# Altium PCB main.PcbDoc (part 2 of 2)
Units mm, origin at the board's own origin, x right, y up, seen from the top; angles counter-clockwise.
Board outline 137 x 49 mm, 4 copper layers (Top Layer, Layer 1, Layer 2, Bottom Layer), stack 0.569 mm thick; 63 components, 65 nets, 373 pads, 299 vias.
Unrouted connection lines stored in the file: 6.
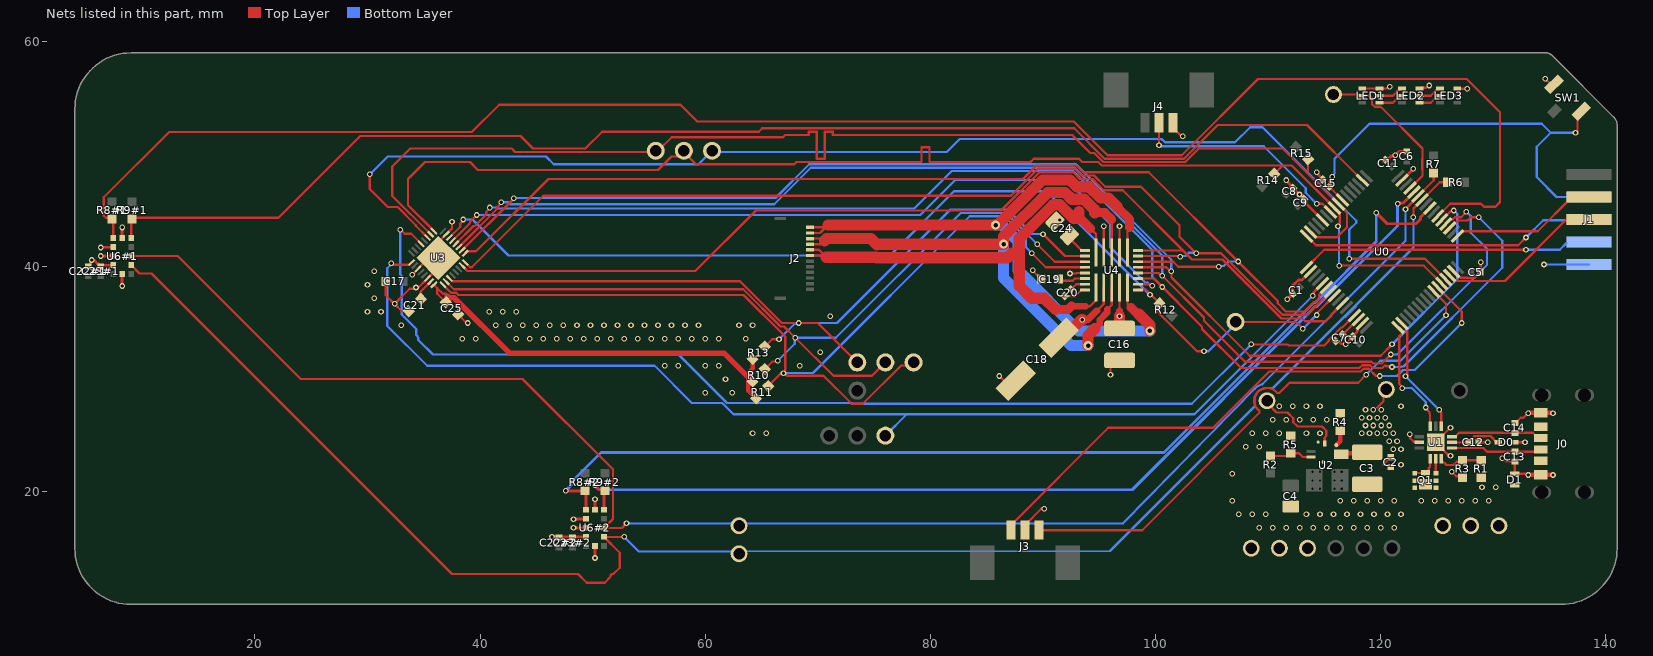
[diagram p4: the nets of this part, all layers, seen from the top]

## Via types
v1: diameter 0.5, hole 0.3, Top Layer to Bottom Layer, tented both sides, 295 vias
v2: diameter 0.8, hole 0.4, Top Layer to Bottom Layer, tented both sides, 4 vias

## Nets (pads, with @x,y where several pads share a name; then routed paths per layer and width w, separated by ;. In a path a pad name is that pad's centre, name@x,y a point inside that pad or via, vN(x,y) a via of type N, cw(c..) or ccw(c..) an arc to the next point about the centre after c; other vN are vias at no path point) (continued)
GND: C1.1 C2.1 C3.1 C4.1 C5.1 C6.1 C7.1 C8.1 C9.1 C10.1 C11.1 C12.1 C13.1 C14.1 C15.1 C16.2 C17.1 C18.1 C21.1 C22#1.1 C22#2.1 C23#1.1 C23#2.1 C24.2 C25.1 D1.2 J0.A12 J0.B12 J1.6 J3.2 J4.1 LED1.1 LED1.6 LED2.6 LED3.6 pad.TP10 pad.TP11 pad.TP12 R3.2 R4.2 R5.2 SW1.2 U0.12 U0.18 U0.31 U0.47 U0.63 U1.2 U1.13 U2.3 U2.9 U3.11 U3.14 U3.31 U3.33 U4.10 U4.12 U4.18 U6#1.2 U6#1.3 U6#1.4 U6#1.6 U6#1.12 U6#2.2 U6#2.3 U6#2.4 U6#2.6 U6#2.12 | length 92.3
  Top Layer w0.2: C17.1@31.625,38.7 31.625,37.475 v1(32.4,36.7) ; C21.1@33.152,36.052 33.048,36.052 v1(32.4,36.7) ; v1(33.962,39.299) 33.964,39.299 34.479,39.814 U3.11@34.48,39.814 35.449,40.783 U3.33@36.297,40.783 ; v1(34.305,38.155) v1@34.411,38.049 ; v1(37.5,44) 37.5,43.403 36.983,42.885 U3.31@36.983,42.883 36.297,42.197 U3.33@36.297,40.783 ; C25.1@38.048,35.752 38.775,35.025 38.875,35.025 v1(38.9,35) ; v1(86.1,30.3) 86.555,29.845 87.545,29.845 C18.1@87.582,29.882 ; J3.2@88.4,16.605 88.4,17.049 89.851,18.5 v1(90.1,18.5) ; C24.2@91.053,44.047 91.397,44.047 v1(91.501,44.151) ; v1(92.4,39.4) 92.95,39.4 92.995,39.445 93.745,39.445 U4.18@93.75,39.45 ; U4.12@95.4,41.25 v1(95.4,43.6) ; v1(96,30.4) 96,31.1 96.58,31.68 C16.2@96.8,31.68 ; U4.10@96.8,41.25 v1(96.8,43.6) ; J4.1@101.55,52.796 101.55,52.351 102.244,51.657 102.343,51.657 v1(102.4,51.6) ; v1(114.3,48.4) 114.3,48.332 114.828,47.804 C15.1@114.828,47.736 ; C7.1@115.995,33.389 116.236,33.389 116.467,33.157 116.843,33.157 v1(116.9,33.1) 116.9,33.154 117.496,33.75 C10.1@117.496,33.804 117.891,34.199 117.891,34.287 117.949,34.346 117.949,34.558 U0.31@118.365,34.973 ; LED1.1@118.36,55.83 LED1.6@119.9,55.83 119.901,55.831 120.55,55.831 120.719,56 v1(120.8,56) ; v1(122.561,25.105) 122.618,25.047 122.618,24.755 122.925,24.449 123.382,24.449 U1.2@123.432,24.399 ; LED2.6@123.44,55.83 123.5,55.89 124.009,55.89 124.219,56.1 v1(124.3,56.1) ; v1(126.2,23.2) 126.143,23.257 126.024,23.257 U1.13@124.882,24.399 126.183,25.7 v1(126.2,25.7) ; v1(126.3,21.8) 126.707,21.393 127.146,21.393 R3.2@127.277,21.261 ; U0.47@126.48,39.569 126.55,39.569 127.09,39.03 128.383,39.03 128.876,39.523 128.876,40.376 v1(128.9,40.4) ; LED3.6@126.8,55.83 126.815,55.815 127.685,55.815 v1(127.7,55.8) ; v1(130.8,23) 130.881,23 131.174,22.707 C13.1@131.92,22.707 131.9,22.687 D1.2@131.9,21.621 132.898,21.621 133.019,21.5 v1(133.1,21.5) ; C14.1@131.92,26.107 131.95,26.107 132.433,26.59 132.69,26.59 v1(133.1,27) ; v1(134.6,56.7) 135.096,56.204 SW1.2@135.396,56.204 ; v1(32.4,36.7) 33.749,38.049 34.038,38.049 34.087,38.097 34.208,38.097 34.256,38.049 v1@34.411,38.049 ; v1@34.411,38.049 U3.14@35.329,38.966 36.297,39.934 U3.33@36.297,40.783
  Top Layer w0.254: C22#1.1@5.2,40.03 5.23,40.03 5.373,40.173 5.373,40.406 5.5,40.533 v1(5.5,40.6) 5.547,40.553 5.747,40.553 6.17,40.13 7.378,40.13 U6#1.2@7.4,40.152 ; v1(6.295,40.952) U6#1.3@7.4,40.952 ; v1@6.314,41.733 7.381,41.733 U6#1.4@7.4,41.752 ; v1(8.2,38.285) U6#1.12@8.2,39.352 ; U6#1.6@8.2,42.552 v1(8.2,43.492) ; v1(46.385,16.025) 46.432,15.978 46.978,15.978 47,16 U6#2.2@49.4,16 ; v1(48.295,16.8) U6#2.3@49.4,16.8 ; v1@48.314,17.581 49.381,17.581 U6#2.4@49.4,17.6 ; v1(50.2,14.133) U6#2.12@50.2,15.2 ; U6#2.6@50.2,18.4 v1(50.2,19.34) ; v1(111.6,47.7) 111.6,47.654 112.204,47.05 C8.1@112.204,47.004 113.37,45.838 113.37,45.608 U0.12@114.829,44.149 ; v1(111.7,37.1) C1.1@112.196,37.596 112.175,37.617 112.175,38.131 ; 112.174,38.131 112.174,38.319 112.689,38.834 113.001,38.834 113.736,39.569 U0.18@113.769,39.569 ; C11.1@120.4,49.5 120.602,49.5 120.955,49.853 121.253,49.853 v1(121.3,49.9) 121.63,50.23 C6.1@122.3,50.23 ; U0.63@121.883,47.684 v1(122.9,48.7) ; C12.1@128.667,24.407 v1(129.507,24.407)
  Top Layer w0.4: v1(133.1,21.5) 133.115,21.515 134.205,21.515 J0.B12@134.22,21.53 134.235,21.515 135.285,21.515 v1(135.3,21.5) ; v1(133.1,27) 133.115,27.015 134.205,27.015 J0.A12@134.22,27.03 134.235,27.015 135.285,27.015 v1(135.3,27)
  Bottom Layer w0.2: v1(134.5,40.2) J1.6@138.5,40.2
  other v1: 109.2,16.8 110.4,16.8 111.6,16.8 112.8,16.8 114,16.8 115.2,16.8 116.4,16.8 117.6,16.8 118.8,16.8 120,16.8 121.2,16.8 48.295,17.562 107.4,18 108.6,18 109.8,18 113.4,18 114.6,18 115.8,18 117,18 118.2,18 119.4,18 120.6,18 121.8,18 106.8,19.2 116.4,19.2 117.6,19.2 118.8,19.2 120,19.2 121.2,19.2 106.8,21.6 108,24 109.2,24 64.2,25.2 65.4,25.2 108.6,25.2 109.8,25.2 111,25.2 113.4,25.2 114.6,25.2 110.4,26.4 111.6,26.4 112.8,26.4 114,26.4 115.2,26.4 111,27.6 112.2,27.6 113.4,27.6 114.6,27.6 121.8,27.6 60,28.8 62.4,28.8 61.8,30 56.4,31.2 57.6,31.2 60,31.2 61.2,31.2 68.4,31.2 70.2,32.4 38.4,33.6 39.6,33.6 43.2,33.6 44.4,33.6 45.6,33.6 46.8,33.6 48,33.6 49.2,33.6 50.4,33.6 51.6,33.6 52.8,33.6 54,33.6 55.2,33.6 56.4,33.6 57.6,33.6 58.8,33.6 60,33.6 61.2,33.6 63.6,33.6 33,34.8 41.4,34.8 42.6,34.8 43.8,34.8 45,34.8 46.2,34.8 47.4,34.8 48.6,34.8 49.8,34.8 51,34.8 52.2,34.8 53.4,34.8 54.6,34.8 55.8,34.8 57,34.8 58.2,34.8 59.4,34.8 63,34.8 64.2,34.8 71.1,35.6 30,36 31.2,36 40.8,36 42,36 43.2,36 30.6,37.2 30,38.4 30.6,39.6 6.295,41.714 112.787,46.421
MOSI: pad.TP35 U0.45 U3.3 | length 115
  Top Layer w0.2: v1(30.2,48.2) 30.2,46.9 31.8,45.3 32.678,45.3 34.281,43.697 34.281,43.647 U3.3@35.329,42.6 ; v1(117.2,40.7) 123.935,40.7 U0.45@125.772,38.862
  Bottom Layer w0.2: v1(30.2,48.2) 31.8,49.8 45.85,49.8 46.55,49.1 59.4,49.1 pad.TP35@60.6,50.3 ; pad.TP35@60.669,49.9 61,49.9 61,49.953 61.247,50.2 81.461,50.2 82.611,51.35 100.528,51.35 100.828,51.05 107.05,51.05 108.4,52.4 109.5,52.4 117.817,44.083 117.817,43.917 117.2,43.3 v1(117.2,40.7)
NetC7_2: C7.2 U0.30 | length 2
  Top Layer w0.2: C7.2@116.603,33.997 116.642,33.997 117.972,35.327 U0.30@118.011,35.327
NetC12_2: C12.2 D0.1 U1.8 | length 4.6
  Top Layer w0.2: U1.8@126.332,24.399 127.799,24.399 C12.2@127.807,24.407 127.807,24.437 128.317,24.947 129.27,24.947 129.28,24.957 129.743,24.957 130.293,24.407 D0.1@130.433,24.407
NetC13_2: C13.2 J0.A5 U1.7 | length 8.1
  Top Layer w0.2: U1.7@126.332,23.899 129.108,23.899 129.44,23.567 C13.2@131.92,23.567 134.007,23.567 J0.A5@134.22,23.78
NetC14_2: C14.2 J0.B5 U1.9 | length 8.2
  Top Layer w0.2: U1.9@126.332,24.899 126.607,24.899 126.955,25.247 129.145,25.247 129.155,25.257 129.859,25.257 129.869,25.247 C14.2@131.92,25.247 133.512,25.247 133.979,24.78 J0.B5@134.22,24.78
NetC15_2: C15.2 J1.9 SW1.1 U0.7 | length 39.3
  Top Layer w0.2: v1(115.7,48) 115.7,47.919 115.457,47.676 115.457,47.15 C15.2@115.436,47.128 115.436,47.103 116.597,45.942 U0.7@116.597,45.916 ; v1(137.3,51.9) 137.482,52.082 137.482,53.482 SW1.1@137.8,53.8
  Bottom Layer w0.2: v1(115.7,48) 115.7,48.067 115.9,48.267 115.9,49.6 119,52.7 134.3,52.7 135.1,51.9 ; v1(137.3,51.9) 135.1,51.9 ; J1.9@138.5,46.2 135.622,46.2 133.85,47.972 133.85,50.65 135.1,51.9
NetC19_1: C19.1 U4.19 | length 2.5
  Top Layer w0.2: C19.1@91.375,38.9 91.525,38.75 92.652,38.75 92.852,38.95 U4.19@93.75,38.95
NetC20_1: C20.1 U4.21 | length 2.1
  Top Layer w0.2: C20.1@91.896,37.396 91.917,37.375 92.858,37.375 93.433,37.95 U4.21@93.75,37.95
NetC20_2: C20.2 U4.20 | length 1.4
  Top Layer w0.2: C20.2@92.504,38.004 92.95,38.45 U4.20@93.75,38.45
NetC21_2: C21.2 U3.15 | length 1.9
  Top Layer w0.2: C21.2@34.7,37.181 34.7,37.533 34.73,37.563 34.7,37.593 34.7,37.771 U3.15@35.611,38.683
NetC24_1: C24.1 U4.14 | length 2.1
  Top Layer w0.2: C24.1@92.347,42.753 92.347,42.536 93.433,41.45 U4.14@93.75,41.45
NetC25_2: C25.2 R10.2 R11.2 R13.2 U3.16 | length 37.1
  Top Layer w0.2: U3.16@35.894,38.4 36.2,38.094 ; C25.2@36.952,36.848 36.2,37.6 36.2,38.094 ; 37.083,37.383 37.083,37.483 36.966,37.6 36.694,37.6 36.2,38.094
  Top Layer w0.4: R10.2@63.838,29.822 63.838,28.967 R11.2@64.501,28.304 ; R10.2@64.201,29.804 64.201,29.849 63.863,30.187 63.855,30.195 63.855,30.595 64.219,30.959 64.219,31.786 R13.2@64.201,31.804
  Top Layer w0.5: 37.083,37.383 37.223,37.244 37.695,37.244 42.639,32.3 61.7,32.3 63.838,30.162
NetJ1_3: J1.3 U0.46 | length 13.3
  Top Layer w0.2: U0.46@126.126,39.216 126.541,38.8 126.754,38.8 126.824,38.73 131.03,38.73 J1.3@136.8,44.5
NetJ1_4: J1.4 U0.49 | length 13.1
  Top Layer w0.2: U0.49@126.833,42.734 127.249,43.15 133.95,43.15 137,46.2 J1.4@138.5,46.2
NetJ1_7: J1.7 U0.17 | length 24
  Top Layer w0.2: U0.17@113.415,39.923 114.992,41.5 v1(132.9,41.5)
  Bottom Layer w0.2: v1(132.9,41.5) 135.9,41.5 136.5,42.1
NetJ1_8: J1.8 U0.16 | length 25.1
  Top Layer w0.2: U0.16@113.344,42.734 U0.16@113.415,42.734 114.243,41.907 132.207,41.907 v1(132.9,42.6)
  Bottom Layer w0.2: v1(132.9,42.6) 134.44,44.14 J1.8@137.16,44.14
NetJ4_2: J4.2 U0.10 | length 19.9
  Top Layer w0.2: v1(100.3,50.8) J4.2@100.3,52.796 ; v1(114.3,45.6) 114.311,45.589 114.803,45.589 U0.10@115.536,44.856
  Bottom Layer w0.2: v1@100.3,50.7 109.6,50.7 113.337,46.963 113.337,46.563 v1(114.3,45.6)
NetLED1_2: LED1.2 pad.TP1 U0.61 | length 14.2
  Top Layer w0.2: pad.TP1@115.8,55.3 118.07,55.3 118.17,55.2 LED1.2@118.36,55.2 119,55.2 119.234,54.966 119.234,54.444 119.467,54.21 119.99,54.21 123.7,50.5 123.7,49.574 123.694,49.567 123.694,48.633 123.7,48.626 123.7,48.087 U0.61@122.59,46.977
NetLED1_4: LED1.4 LED2.2 | length 2.3
  Top Layer w0.2: LED1.4@119.9,54.57 121.08,54.57 121.71,55.2 LED2.2@121.9,55.2
NetLED1_5: LED1.5 LED2.1 | length 2.3
  Top Layer w0.2: LED1.5@119.9,55.2 121.08,55.2 121.71,55.83 LED2.1@121.9,55.83
NetLED2_4: LED2.4 LED3.2 | length 2.1
  Top Layer w0.2: LED2.4@123.44,54.57 124.44,54.57 125.07,55.2 LED3.2@125.26,55.2
NetLED2_5: LED2.5 LED3.1 | length 2.1
  Top Layer w0.2: LED2.5@123.44,55.2 124.44,55.2 125.07,55.83 LED3.1@125.26,55.83
NetQ1_G: Q1.G U1.5 | length 1.3
  Top Layer w0.2: U1.5@124.882,22.949 124.891,22.94 124.891,21.659 Q1.G@124.9,21.65
NetR1_2: R1.2 R3.1 U1.6 | length 4
  Top Layer w0.2: U1.6@125.382,22.949 125.382,22.861 125.843,22.4 126.468,22.4 126.747,22.679 127.146,22.679 R3.1@127.277,22.811 R1.2@128.928,22.811
NetR2_2: R2.2 R5.1 U2.2 | length 3.8
  Top Layer w0.2: R2.2@110.221,23.192 111.766,23.192 R5.1@112,23.425 112.749,23.425 113.078,23.096 U2.2@113.795,23.096
NetR4_1: R4.1 U2.7 | length 1.4
  Top Layer w0.4: U2.7@116.058,24.158 116.4,24.501 R4.1@116.4,25.425
NetR8#1_2: R8#1.2 U0.54 U6#1.5 | length 151.8
  Top Layer w0.2: U6#1.5@7.4,42.552 7.4,44.152 R8#1.2@7.311,44.241 7.206,44.346 6.769,44.346 6.578,44.538 6.578,46.166 12.374,51.962 39.262,51.962 41.7,54.4 57.793,54.4 59.293,52.9 92.723,52.9 95.723,49.9 102.316,49.9 109.093,56.677 127.639,56.677 130.596,53.72 130.596,45.742 130.185,45.33 129.17,45.33 128.9,45.6 126.163,45.6 U0.54@125.065,44.502
NetR8#2_2: R8#2.2 U0.56 U6#2.5 | length 93.2
  Top Layer w0.254: v1(47.6,20.1) 47.611,20.089 R8#2.2@49.311,20.089 49.4,20 U6#2.5@49.4,18.4 ; v1(119.6,44.8) 120.577,43.823 123.139,43.823 123.541,44.225 123.541,44.392 U0.56@124.358,45.209
  Bottom Layer w0.254: v1(47.6,20.1) 48.208,20.708 48.208,20.973 50.735,23.5 70.369,23.5 70.376,23.493 71.624,23.493 71.631,23.5 100.734,23.5 114.073,36.839 114.204,36.839 119.6,42.234 v1(119.6,44.8)
NetR9#1_2: R9#1.2 U0.2 U6#1.7 | length 119.7
  Top Layer w0.2: U6#1.7@9,42.552 9,44.152 R9#1.2@9.089,44.241 9.194,44.346 22.098,44.346 29.36,51.608 43.592,51.608 44.7,50.5 49.34,50.5 50.84,52 64.759,52 65.059,52.3 92.767,52.3 95.467,49.6 102.517,49.6 105.517,52.6 113.449,52.6 U0.2@118.365,47.684
NetR9#2_2: R9#2.2 U0.60 U6#2.7 | length 87.9
  Top Layer w0.254: v1(50.2,20.6) 50.2,20.541 50.547,20.194 50.984,20.194 R9#2.2@51.089,20.089 51,20 U6#2.7@51,18.4 ; v1(121.5,45.6) 121.547,45.647 121.968,45.647 U0.60@122.944,46.623
  Bottom Layer w0.254: v1(50.2,20.6) 50.2,20.541 50.547,20.194 97.929,20.194 114.22,36.485 114.351,36.485 121.5,43.634 v1(121.5,45.6)
NetR10_1: pad.TP29 R10.1 U3.18 U4.16 | length 79.3
  Top Layer w0.2: U3.18@36.983,38.683 36.986,38.683 37.669,38 63.376,38 66.676,34.7 67,34.7 v1(68,33.7) 71.38,30.32 74.82,30.32 pad.TP29@76,31.5 ; R10.1@65.296,30.899 65.991,31.594 66.391,31.594 v1(66.449,31.651) ; v1(89.5,42) 91.05,40.45 U4.16@93.75,40.45
  Bottom Layer w0.2: v1(66.449,31.651) 67.947,33.15 67.947,33.647 v1(68,33.7) 71.6,33.7 82.684,44.784 86.716,44.784 v1(89.5,42)
NetR11_1: pad.TP30 R11.1 U3.17 U4.17 | length 86.6
  Top Layer w0.2: U3.17@36.7,38.4 36.703,38.4 37.409,37.694 37.882,37.694 38.076,37.5 63.4,37.5 67.099,33.801 67.099,30.783 66.949,30.633 v1(66.949,30.551) ; R11.1@65.596,29.399 66.691,30.494 66.891,30.494 v1(66.949,30.551) ; pad.TP30@78.5,31.5 78.232,31.232 77.401,31.232 73.989,27.82 73.011,27.82 70.511,30.32 67.261,30.32 67.03,30.551 v1(66.949,30.551) ; v1(89,41.2) 90.25,39.95 U4.17@93.75,39.95
  Bottom Layer w0.2: v1(66.949,30.551) 69.568,30.551 83.5,44.484 86.562,44.484 88.5,42.546 88.5,41.7 v1(89,41.2)
NetR12_2: pad.TP27 R12.2 U0.24 U3.30 U4.1 | length 93.8
  Top Layer w0.2: U3.30@37.266,42.6 38.223,43.557 38.223,43.842 38.5,44.119 v1(38.5,44.2) ; U4.1@98.45,37.95 99.15,37.95 R12.2@100.352,36.748 100.352,36.561 100.106,36.315 100.106,36.067 103.673,32.5 v1(104.3,32.5) ; pad.TP27@107.1,35.1 112.489,35.1 v1(113.089,34.5) ; v1(114.3,35.711) 114.357,35.768 114.357,35.916 U0.24@115.89,37.448
  Bottom Layer w0.2: v1(38.5,44.2) 39.322,44.2 42.522,41 76.4,41 82.1,46.7 90.3,46.7 v1(99.5,37.5) ; v1(104.3,32.5) 104.7,32.5 107.1,34.9 pad.TP27@107.1,35.1 ; v1(113.089,34.5) v1(114.3,35.711)
NetR13_1: pad.TP28 R13.1 U3.19 U4.15 | length 74.5
  Top Layer w0.2: U3.19@37.266,38.966 37.269,38.966 37.523,38.711 63.089,38.711 66.8,35 v1(68.3,35) 70,35 pad.TP28@73.5,31.5 ; R13.1@65.296,32.899 65.949,33.551 v1(66.549,33.551) ; v1(90,42.9) 91.95,40.95 U4.15@93.75,40.95
  Bottom Layer w0.2: v1(66.549,33.551) 67.94,34.943 v1@68.243,34.943 ; v1(68.3,35) 71.7,35 81.784,45.084 86.841,45.084 89.024,42.9 v1(90,42.9)
NetU0_22: U0.22 U3.25 U4.6 | length 95.5
  Top Layer w0.2: U3.25@38.68,41.186 38.873,41.379 39.643,41.379 46.065,47.8 88.23,47.8 89.432,49.002 92.943,49.002 93.545,48.4 99.4,48.4 v1(107.331,40.469) 110.85,36.95 110.85,36.748 111.567,36.031 113.208,36.031 114.044,36.866 114.193,36.866 114.515,37.188 114.515,37.488 U0.22@115.183,38.155 ; U4.6@98.45,40.45 101.572,40.45 102.022,40 v1(105.6,40)
  Bottom Layer w0.2: v1(105.6,40) 105.657,40.057 106.057,40.057 106.469,40.469 v1(107.331,40.469)
NetU0_23: U0.23 U3.24 U4.7 | length 92.8
  Top Layer w0.2: U3.24@38.68,40.38 39.097,39.963 39.263,39.963 45.6,46.3 87.154,46.3 89.556,48.702 92.818,48.702 93.421,48.1 94.525,48.1 95.525,47.1 98.7,47.1 102.125,43.675 102.125,42.675 v1(103.6,41.2) 105.814,41.2 111.283,35.731 113.465,35.731 114.301,36.566 114.318,36.566 114.815,37.064 114.815,37.081 U0.23@115.536,37.802 ; U4.7@98.45,40.95 102.148,40.95 v1(102.199,40.899)
  Bottom Layer w0.2: v1(102.199,40.899) 102.257,40.957 102.657,40.957 102.95,41.25 103.55,41.25 v1(103.6,41.2)
NetU0_26: U0.26 U3.23 U4.8 | length 92.2
  Top Layer w0.2: U3.23@38.397,40.097 38.874,39.62 59.12,39.62 64.5,45 86.278,45 89.681,48.402 92.694,48.402 93.296,47.8 94.401,47.8 95.001,47.2 95.401,46.8 97.076,46.8 102.426,41.45 ; U4.8@98.45,41.45 102.426,41.45 ; U0.26@116.597,36.741 115.631,35.775 115.631,35.676 115.117,35.161 113.272,35.161 113.034,35.4 111.189,35.4 105.953,40.636 103.24,40.636 102.426,41.45
NetU0_29: U0.29 U3.5 | length 101.7
  Top Layer w0.2: v1(32.9,43.3) 32.919,43.3 33.299,42.921 33.876,42.921 U3.5@34.763,42.034 ; v1(108.5,33.1) 111.729,33.1 111.829,33 114.977,33 115.392,33.415 115.392,33.493 116.499,34.6 116.577,34.6 U0.29@117.658,35.68
  Bottom Layer w0.2: v1(32.9,43.3) 32.9,39.323 33.043,39.18 33.043,35.757 34.325,34.475 34.325,33.958 34.431,33.852 ccw(c35.459,34.245) 34.442,33.824 34.494,33.699 34.494,33.513 34.552,33.454 35.807,32.2 57.624,32.2 61.924,27.9 73.073,27.9 ccw(c73.5,29) 73.503,27.82 103.22,27.82 v1(108.5,33.1)
NetU0_33: U0.33 U1.12 | length 10.7
  Top Layer w0.2: U0.33@121.53,34.62 121.945,34.204 121.945,34.134 121.65,33.838 121.65,29.576 121.945,29.281 v1@121.945,29.245 ; v1(124,27.5) 124,27.419 124.34,27.079 124.34,26.948 124.382,26.906 U1.12@124.382,25.849
  Bottom Layer w0.2: v1(121.923,29.223) 122.755,29.223 124,27.978 v1(124,27.5)
NetU0_34: U0.34 U1.10 | length 10.7
  Top Layer w0.2: U0.34@121.883,34.973 122.299,34.558 122.299,34.346 122.357,34.287 122.357,30.439 v1(122.2,30.281) ; v1(125.191,27.3) 125.191,27.219 125.382,27.027 U1.10@125.382,25.849
  Bottom Layer w0.2: v1(122.2,30.281) 125.181,27.3 v1@125.2,27.3
NetU0_51: U0.51 U3.28 U4.3 | length 119.4
  Top Layer w0.2: U3.28@37.831,42.034 39.418,43.621 39.521,43.621 40.54,44.64 40.54,44.874 40.843,45.176 v1(40.843,45.257) ; U4.3@98.45,38.95 99.85,38.95 104.129,34.671 104.129,34.471 107.6,31 118.098,31 118.348,31.25 119.052,31.25 119.302,31 120.124,31 120.324,31.2 120.49,31.2 120.533,31.157 120.943,31.157 v1(121,31.1) ; U0.51@126.126,43.442 126.197,43.442 126.855,44.1 127.7,44.1 128,44.4 v1(128.7,44.4)
  Bottom Layer w0.2: v1(40.843,45.257) 41.472,45.257 41.556,45.173 78.573,45.173 81.9,48.5 92.678,48.5 99.7,41.478 99.7,39.1 v1(100.6,38.2) ; v1(121,31.1) 121.817,31.1 121.848,31.131 122.031,31.131 130.8,39.9 130.8,42.3 v1(128.7,44.4)
NetU0_52: U0.52 U3.27 U4.4 | length 116.7
  Top Layer w0.2: U3.27@38.114,41.751 38.117,41.751 41.523,45.157 41.523,45.299 41.877,45.652 v1(41.877,45.723) ; U4.4@98.45,39.45 100.269,39.45 100.519,39.2 v1(100.6,39.2) 104.304,35.496 104.304,35.196 107.95,31.55 119.176,31.55 119.326,31.4 120.1,31.4 v1(120.9,32.2) ; U0.52@125.772,43.795 126.188,44.21 126.4,44.21 126.59,44.4 127.141,44.4 127.6,44.859 v1(127.6,44.9)
  Bottom Layer w0.2: v1(41.877,45.723) 42.506,45.723 42.679,45.55 66.116,45.55 69.366,48.8 92.802,48.8 100.6,41.002 v1(100.6,39.2) ; v1(120.9,32.2) 121.478,32.2 129.45,40.172 129.45,41.571 128,43.02 128,44.5 v1(127.6,44.9)
NetU0_53: U0.53 U3.26 U4.5 | length 113.1
  Top Layer w0.2: U3.26@38.397,41.468 38.4,41.468 43,46.069 v1(43,46.1) ; U4.5@98.45,39.95 100.972,39.95 101.322,39.6 v1(101.4,39.6) 101.419,39.581 101.419,39.05 108.369,32.1 120,32.1 v1(121,33.1) ; U0.53@125.419,44.149 126.213,44.943 126.443,44.943 v1(126.5,45)
  Bottom Layer w0.2: v1(43,46.1) 66.242,46.1 69.242,49.1 92.926,49.1 101.4,40.626 v1(101.4,39.6) ; v1(121,33.1) 126.8,38.9 126.8,44.7 v1(126.5,45)
NetU3_29: U3.29 U4.2 | length 70.9
  Top Layer w0.2: U3.29@37.549,42.317 37.551,42.317 39.108,43.873 39.108,44.008 v1(39.7,44.6) ; U4.2@98.45,38.45 99.469,38.45 99.619,38.3 v1(99.7,38.3)
  Bottom Layer w0.2: v1(39.7,44.6) 79.1,44.6 82.2,47.7 92.078,47.7 95.95,43.828 95.95,41.75 99.09,38.61 99.309,38.61 99.619,38.3 v1(99.7,38.3)
PG: pad.TP0@109.9,28.1 U2.8 | length 7.4
  Top Layer w0.2: pad.TP0@110.1,27.7 110.75,27.05 111.728,27.05 112.225,26.553 112.225,26.197 112.622,25.8 114.778,25.8 115.15,25.428 115.15,24.972 115.02,24.843 U2.8@115.02,24.296
RX: J3.1 U0.43 | length 52.5
  Top Layer w0.2: J3.1@87.15,16.605 87.15,17.049 95.801,25.7 105.1,25.7 110.1,30.7 118.222,30.7 118.472,30.95 118.928,30.95 119.578,30.3 v1(119.9,30.3) ; U0.43@125.065,38.155 127.2,36.021 v1(127.2,35)
  Bottom Layer w0.2: v1(119.9,30.3) 121.441,30.3 121.972,30.831 123.031,30.831 v1(127.2,35)
SCL: pad.TP14 R6.2 U0.58 U6#1.10 U6#2.10 | length 150.6
  Top Layer w0.2: U6#1.10@9,40.152 9.752,39.4 10.8,39.4 37.5,12.7 48.699,12.7 49.467,11.932 51.06,11.932 51.589,12.461 51.589,12.583 51.706,12.7 51.828,12.7 52.401,13.273 52.401,14.599 U6#2.10@51,16 v1(52.8,16) ; v1(122.9,44.4) 122.9,45.165 U0.58@123.651,45.916 125.235,47.5 R6.2@125.925,47.5
  Bottom Layer w0.2: v1(52.8,16) 54.041,14.759 54.1,14.7 63,14.7 63.166,14.7 95.959,14.759 108.828,27.628 108.828,27.711 108.796,27.858 cw(c109.9,28.1) 109.899,29.23 110.43,29.23 122.9,41.7 v1(122.9,44.4)
SCL/SCK: pad.TP25 R15.2 U0.8 U0.15 U3.2 | length 109.4
  Top Layer w0.2: U3.2@35.611,42.883 32.2,46.294 32.2,48.9 33.8,50.5 42.8,50.5 43.1,50.2 54.953,50.2 55.2,50.447 55.2,50.7 pad.TP25@55.531,50.7 ; pad.TP25@55.6,50.3 55.81,50.3 57.01,51.5 66.9,51.5 67.1,51.7 69.1,51.7 69.2,51.7 69.2,52 69.908,52 69.908,49.602 70.616,49.602 70.616,52 71.324,52 71.324,51.7 71.8,51.7 92.6,51.7 94.2,50.1 94.543,50.1 95.343,49.3 102.641,49.3 103.841,50.5 111.306,50.5 113.403,48.403 ; R15.2@113.548,49.552 113.53,49.534 113.53,48.53 113.403,48.403 ; U0.15@113.769,43.088 113.839,43.088 114.313,42.614 116.114,42.614 117,43.5 117,44.806 U0.8@116.243,45.563 113.403,48.403
SDA: pad.TP13 R7.2 U0.59 U6#1.9 U6#2.9 | length 145
  Top Layer w0.2: U6#1.9@9,40.952 13.148,40.952 24.074,30.026 43.772,30.026 51.795,22.003 51.795,17.595 U6#2.9@51,16.8 52.6,16.8 v1(53,17.2) ; v1(122.2,45.1) 122.2,45.136 123.298,46.234 U0.59@123.298,46.27 124.7,47.672 R7.2@124.7,48.325
  Bottom Layer w0.2: v1(53,17.2) 63,17.2 97.099,17.2 97.157,17.259 ccw(c97.016,17.4) 97.16,17.261 108.806,29.169 cw(c109.9,28.1) 109.468,29.568 122.2,42.3 v1(122.2,45.1)
SDA/MISO: pad.TP26 R14.2 U0.9 U0.44 U3.1 | length 110.8
  Top Layer w0.2: U3.1@35.894,43.165 33.6,45.46 33.6,47.8 35.102,49.302 39.098,49.302 39.8,48.6 55.8,48.6 56.993,49.793 58.007,49.793 58.247,50.032 59.179,49.1 67.898,49.1 68.101,49.302 79.1,49.302 79.2,49.302 79.2,50.619 79.908,50.619 79.908,49.302 81.437,49.302 88.884,49.302 89.184,49.602 93.191,49.602 93.491,49.302 94.917,49.302 95.219,49 111.3,49 ; pad.TP26@58.1,50.144 pad.TP26@58.1,50.3 ; R14.2@110.548,48.248 111.3,49 ; v1(116.2,43.6) 116.2,43.681 116.364,43.845 116.364,44.665 115.89,45.139 U0.9@115.89,45.209 112.099,49 111.3,49 ; v1(116.3,40.1) 123.828,40.1 U0.44@125.419,38.509
  Bottom Layer w0.2: v1(116.2,43.6) 116.3,43.5 v1(116.3,40.1)
TX: J3.3 U0.42 | length 48.3
  Top Layer w0.2: J3.3@89.65,16.605 94.902,16.605 98.6,16.605 98.805,16.605 109.22,27.02 109.22,27.103 109.22,27.186 109.161,27.244 109.157,27.249 cw(c109.9,28.1) 110.751,28.843 110.756,28.839 110.814,28.78 110.897,28.78 110.98,28.78 111.9,29.7 118,29.7 v1(118.7,30.4) ; U0.42@124.712,37.802 125.8,36.713 v1(125.8,35.7)
  Bottom Layer w0.2: v1(118.7,30.4) 119.95,31.65 121.75,31.65 v1(125.8,35.7)
U: J2.1 J2.2 U4.9 U4.26 | length 60.4
  Top Layer w0.2: J2.2@69.3,43 70.2,43 70.9,43.7 70.7,43.5 J2.1@69.3,43.5 ; U4.26@97.5,38.15 97.5,36.7 97.8,36.4 ; U4.9@97.5,41.25 97.5,43.3 97.7,43.5
  Top Layer w0.8: 96.6,45.3 97.7,44.2 97.7,43.5 ; 97.8,36.4 98.4,35.8 98.5,35.8
  Top Layer w1: 70.9,43.7 v2(85.8,43.7) 85.968,43.7 89.971,47.702 92.404,47.702 93.006,47.1 94.111,47.1 95.111,46.1 95.8,46.1 96.6,45.3 ; 98.5,35.8 99.5,34.8 v2(99.5,34.3)
  Bottom Layer w1: v2(85.8,43.7) 86.356,43.7 87.8,42.256 87.8,39.656 93.156,34.3 v2(99.5,34.3)
V: J2.3 J2.4 U4.11 U4.24 | length 54
  Top Layer w0.2: J2.4@69.3,42 70.3,42 70.6,42.3 70.4,42.5 J2.3@69.3,42.5 ; 95.7,36.2 96.1,36.6 U4.24@96.1,38.15 ; U4.11@96.1,41.25 96.1,44.2
  Top Layer w0.6: 94.6,34.5 95.04,34.94 95.04,35.27 95.7,35.93 95.7,36.2
  Top Layer w0.8: 94.6,44.8 95.5,44.8 96.1,44.2
  Top Layer w1: 70.6,42.3 70.8,42.5 74.7,42.5 75.25,41.95 ; 75.3,42 v2(86.5,42) 86.5,42.676 90.426,46.602 91.948,46.602 92.551,46 93.656,46 94.6,45.056 94.6,44.8 ; v2(94,33) 94,33.9 94.6,34.5
  Bottom Layer w1: v2(86.5,42) 86.5,39 92.5,33 v2(94,33)
VBUS: D0.2 D1.1 J0.A9 J0.B9 pad.TP3 pad.TP4 pad.TP5 Q1.D R1.1 | length 0.9
  Top Layer w0.2: D0.2@131.883,24.407 v1(132.809,24.407)
  other v1: 123.6,19.2 124.8,19.2 126,19.2 127.2,19.2 128.4,19.2 129.6,19.2 129,20.4 130.2,20.4
VH: C2.2 C3.2 C16.1 C18.2 C19.2 pad.TP6 Q1.S U1.4 U2.6 U4.23 U4.25 | length 18.3
  Top Layer w0.2: v1(89.1,39.7) 89.1,39.651 89.825,38.925 C19.2@89.825,38.9 ; 94.8,36.1 95.4,36.7 U4.23@95.4,38.15 ; 96.8,36.1 U4.25@96.8,38.15 ; 119.7,27.5 120.251,28.051 120.251,28.851 pad.TP6@120.5,29.1 ; 120.2,22.4 120.2,22.43 120.849,23.079 C2.2@120.879,23.079 ; Q1.S@123.02,21.65 123.04,21.67 123.94,21.67 Q1.S@123.96,21.69 124.12,21.69 124.26,21.83 124.26,22.102 124.382,22.224 U1.4@124.382,22.949
  Top Layer w0.4: U2.6@116.495,23.346 116.582,23.433 117.64,23.433 117.658,23.415 C3.2@117.658,23.186
  Top Layer w0.6: v1(93.5,35.3) 94,35.3 94.8,36.1 ; v1(96.8,35.6) 96.8,36.1
  Top Layer w1: C18.2@91.4,33.7 91.824,33.7 93.424,35.3 v1(93.5,35.3) ; C16.1@96.8,34.52 v1(96.8,35.6)
  other v1: 121.8,22.4 121.1,23.8 121.8,23.8 120.75,24.5 121.45,24.5 118.3,25.2 119,25.2 119.7,25.2 120.4,25.2 121.1,25.2 118.65,25.9 119.35,25.9 120.05,25.9 120.75,25.9 118.3,26.6 119,26.6 119.7,26.6 120.4,26.6 118.65,27.3 119.35,27.3 120.05,27.3
W: J2.5 J2.6 U4.13 U4.22 | length 45
  Top Layer w0.2: J2.6@69.3,41 70.6,41 70.75,40.85 70.1,41.5 J2.5@69.3,41.5 ; 93.8,36.5 94.167,36.5 94.7,37.032 U4.22@94.7,38.15 ; 94.2,43.4 94.7,42.9 U4.13@94.7,41.25
  Top Layer w0.6: 92.517,36.5 93.8,36.5
  Top Layer w0.8: 91.1,36.2 92.217,36.2 92.517,36.5 ; 93.398,44.202 94.2,43.4
  Top Layer w1: 70.75,40.85 75.15,40.85 ; 75.2,40.8 86.856,40.8 87.256,41.2 87.9,41.2 ; 91.1,36.2 90.1,37.2 89,37.2 87.9,38.3 87.9,41.2 ; 93.2,44.9 93.2,44.3 92.695,44.3 91.493,45.502 90.882,45.502 87.9,42.52 87.9,41.2
Z: pad.TP24 U0.21 U3.9 | length 101.6
  Top Layer w0.2: v1(32.1,40.3) 32.181,40.3 32.294,40.187 33.719,40.187 33.912,40.38 U3.9@33.914,40.38 ; v1(113.965,37.416) 114.023,37.473 114.023,37.702 U0.21@114.829,38.509
  Bottom Layer w0.2: v1(32.1,40.3) 32.1,40.219 31.757,39.876 31.757,34.743 35.3,31.2 55.5,31.2 58.8,27.9 61.5,27.9 62.5,26.9 77.9,26.9 ; pad.TP24@76,25 77.9,26.9 ; v1(113.965,37.416) 103.45,26.9 77.9,26.9
pads on no net: J0.7 J0.8 J0.9 J0.10 J1.1 J1.2 J1.5 J2.7 J2.8 J2.9 J2.10 J2.11 J2.12 J2.P1 J2.P2 J3.4 J3.5 J4.4 J4.5 LED3.4 LED3.5 SW1.4 U0.3 U0.4 U0.5 U0.6 U0.11 U0.25 U0.27 U0.28 U0.37 U0.38 U0.39 U0.40 U0.41 U0.62 U2.1 U2.5 U3.6 U3.7 U3.12 U3.20 U3.21 U3.22 U3.32 U6#1.8 U6#2.8

## Polygon pours and split planes (outlines as drawn)
VH on Top Layer "VH_L01_P002" (solid, pour order 2): 117.4,27.4 117.4,22.9 118.4,21.9 121.4,21.9 122.1,21.2 124.5,21.2 124.5,23.6 124.4,23.7 122.806,23.7 120.029,27.8 117.8,27.8
VBUS on Top Layer "VBUS_L01_P000" (solid, pour order 0): 130.9,19.7 129.8,18.6 123.2,18.6 122.1,19.7 122.1,21.2 126,21.2 126.8,20.4 128.1,20.4 128.1,22.1 128.2,22.2 129.9,22.2 130.9,21.2
GND on Top Layer "NONET_L01_P-001" (solid, pour order 5): 71.3,35.892 71.3,30.267 64.531,23.369 57.3,30.6 34.9,30.6 28.7,36.8 28.7,40.4 39.7,40.4 44.1,36
3V3 on Top Layer "3V3_L01_P003" (solid, pour order 3): 109.2,22.7 115.2,22.7 115.2,19.1 107.3,19.1 107.3,22.7
GND on Top Layer "GND_L01_P004" (solid, pour order 4): 112,29 106,23 106,18.8 108.7,16.1 122.1,16.1 122.1,25.3 118.4,29
VBUS on Top Layer "VBUS_L01_P001" (solid, remove dead copper, pour order 1): 133.512,26.2 133.512,22.312 132.4,21.2 130.9,21.2 130.9,19.6 132.2,18.3 135.4,18.3 136.8,19.7 136.8,25 135.6,26.2
GND on Layer 1 (split plane): 134.689,58.49 134.75,58.477 134.807,58.454 134.859,58.419 134.88,58.398 140.327,52.951 140.366,52.913 140.426,52.822 140.468,52.721 140.49,52.613 140.49,52.559 140.49,44.01 138.2,44.01 138.14,44.01 138.1,44.007 138.041,44.001 138.024,43.996 137.945,43.972 137.835,43.926 137.746,43.879 137.669,43.815 137.585,43.731 137.521,43.654 137.474,43.565 137.428,43.455 137.413,43.404 137.399,43.359 137.39,43.26 137.39,43.14 137.399,43.041 137.413,42.996 137.428,42.945 137.474,42.835 137.521,42.746 137.585,42.669 137.669,42.585 137.746,42.521 137.835,42.474 137.945,42.428 138.024,42.404 138.041,42.399 138.1,42.393 138.14,42.39 138.2,42.39 140.49,42.39 140.49,15 140.49,14.706 140.413,14.122 140.26,13.554 140.035,13.01 139.741,12.5 139.383,12.033 138.966,11.617 138.5,11.259 137.99,10.965 137.446,10.74 136.878,10.587 136.294,10.51 136,10.51 9,10.51 8.706,10.51 8.122,10.587 7.554,10.74 7.01,10.965 6.5,11.259 6.033,11.617 5.617,12.033 5.259,12.5 4.965,13.01 4.74,13.554 4.587,14.122 4.51,14.706 4.51,15 4.51,54 4.51,54.294 4.587,54.878 4.74,55.446 4.965,55.99 5.259,56.5 5.617,56.967 6.033,57.383 6.5,57.741 7.01,58.035 7.554,58.26 8.122,58.413 8.706,58.49 9,58.49 134.659,58.49
3V3 on Layer 2 (split plane): 134.689,58.49 134.75,58.477 134.807,58.454 134.859,58.419 134.88,58.398 140.327,52.951 140.366,52.913 140.426,52.822 140.468,52.721 140.49,52.613 140.49,52.559 140.49,44.01 138.2,44.01 138.14,44.01 138.1,44.007 138.041,44.001 138.024,43.996 137.945,43.972 137.835,43.926 137.746,43.879 137.669,43.815 137.585,43.731 137.521,43.654 137.474,43.565 137.428,43.455 137.413,43.404 137.399,43.359 137.39,43.26 137.39,43.14 137.399,43.041 137.413,42.996 137.428,42.945 137.474,42.835 137.521,42.746 137.585,42.669 137.669,42.585 137.746,42.521 137.835,42.474 137.945,42.428 138.024,42.404 138.041,42.399 138.1,42.393 138.14,42.39 138.2,42.39 140.49,42.39 140.49,31.129 125,31.129 124.95,31.12 124.908,31.092 122.208,28.392 122.18,28.35 122.171,28.3 122.171,26.143 121.107,27.207 114.307,34.007 114.276,34.031 114.239,34.046 114.2,34.051 101.763,34.051 95.507,40.307 95.476,40.331 95.461,40.337 95.439,40.346 95.4,40.351 88.2,40.351 88.161,40.346 88.124,40.331 88.093,40.307 86.093,38.307 86.069,38.276 86.054,38.239 86.049,38.2 86.049,31.6 86.054,31.561 86.069,31.524 86.093,31.493 88.893,28.693 88.924,28.669 88.961,28.654 89,28.649 111.837,28.649 122.171,18.316 122.171,11.354 121.327,10.51 9,10.51 8.706,10.51 8.122,10.587 7.554,10.74 7.01,10.965 6.5,11.259 6.033,11.617 5.617,12.033 5.259,12.5 4.965,13.01 4.74,13.554 4.587,14.122 4.51,14.706 4.51,15 4.51,54 4.51,54.294 4.587,54.878 4.74,55.446 4.965,55.99 5.259,56.5 5.617,56.967 6.033,57.383 6.5,57.741 7.01,58.035 7.554,58.26 8.122,58.413 8.706,58.49 9,58.49 134.659,58.49
VBUS on Layer 2 (split plane): 140.49,15 140.49,14.706 140.413,14.122 140.26,13.554 140.035,13.01 139.741,12.5 139.383,12.033 138.966,11.617 138.5,11.259 137.99,10.965 137.446,10.74 136.878,10.587 136.294,10.51 136,10.51 121.694,10.51 122.392,11.208 122.42,11.25 122.429,11.3 122.429,18.322 122.431,18.324 122.446,18.361 122.451,18.4 122.446,18.439 122.431,18.476 122.429,18.478 122.429,25.722 122.431,25.724 122.446,25.761 122.451,25.8 122.446,25.839 122.431,25.876 122.429,25.878 122.429,28.246 125.054,30.871 140.49,30.871
VH on Layer 2 (split plane): 101.593,33.793 101.624,33.769 101.661,33.754 101.7,33.749 114.137,33.749 120.893,26.993 122.171,25.716 122.171,18.743 112.007,28.907 111.976,28.931 111.939,28.946 111.9,28.951 89.063,28.951 86.351,31.663 86.351,38.137 88.263,40.049 95.337,40.049

## Other copper
Top Layer:
  text "鄭" at 80.1,56.08 h1.5
  text "泊" at 80.1,55.014 h1.5
  text "聲" at 80.1,53.875 h1.5
  text "Frictional AI / Sliding wheel / Ben Posheng Cheng" at 67.2,53.702 h1
Layer 2 (plane layer: these items are gaps in the copper):
  lines w0.254: 121,10 122.3,11.3 122.3,28.3 125,31 140.9,31
  lines w0.3: 122.3,18.4 111.9,28.8 111.6,28.8 106.8,28.8 89,28.8 86.2,31.6 86.2,38.2 88.2,40.2 95.4,40.2 101.7,33.9 114.2,33.9 121,27.1 ; 122.3,25.8 121,27.1 ; 121,27.1 121,27.1

## Silkscreen, mask and mechanical layers (free items; w line width, h text height)
Top Overlay:
  text "RESET" at 133.022,53.608 h1.5 r315
  text "SDA/SCK" at 56.632,50.881 h1.5 r45
  text "SCL/MISO" at 59.132,50.881 h1.5 r45
  text "DIR/MOSI" at 61.732,50.881 h1.5 r45
  text "3V3" at 97.491,49.721 h1.5 r45
  text "ADC" at 99.492,49.622 h1.5 r45
  text "GND" at 101.491,49.621 h1.5 r45
  text "FLT" at 108.35,34.745 h1.5
  text "ISA" at 72.551,32.831 h1.5
  text "ISB" at 75.051,32.831 h1.5
  text "ISC" at 77.451,32.831 h1.5
  text "VH" at 121.651,28.745 h1.5
  text "FLT" at 128.15,28.645 h1.5
  text "CS" at 74.75,28.531 h1.5
  text "PG" at 107.551,27.731 h1.5
  text "A" at 70.651,23.145 h1.5
  text "B" at 73.25,23.145 h1.5
  text "Z" at 75.751,23.145 h1.5
  text "GND" at 88.769,18.05 h1.5 r90
  text "RX" at 86.051,17.945 h1.5
  text "TX" at 89.451,17.945 h1.5
  text "SDA" at 64.251,16.531 h1.5
  text "VBUS" at 128.451,15.031 h1.5
  text "SCL" at 64.251,14.031 h1.5
  text "GND" at 111.85,13.031 h1.5
  text "3V3" at 119.85,13.031 h1.5
Top Solder:
  text "鄭" at 80.1,56.08 h1.5
  text "泊" at 80.1,55.014 h1.5
  text "聲" at 80.1,53.875 h1.5
  text "Frictional AI / Sliding wheel / Ben Posheng Cheng" at 67.2,53.702 h1
Mechanical 1:
  circle w0.013: c41.603,35.497 r1.5
  circle w0.013: c30.997,46.103 r1.5
  circle w0.013: c42.725,40.8 r0.75
  circle w0.013: c36.3,47.1 r0.875
  circle w0.013: c30.997,35.497 r1.5
  circle w0.013: c36.3,34.5 r0.875
  circle w0.013: c36.3,40.8 r5.077
  circle w0.013: c36.3,40.8 r5.75
  lines w0.013: 25.4,40.8 36.3,40.8 36.3,51.7 ; 46.975,36.8 cw(c36.3,40.8) 46.975,44.8 ; 45.475,37.3 ccw(c46.475,37.3) 46.24,36.328 cw(c36.3,40.8) 46.24,45.272 ccw(c46.475,44.3) 45.475,44.3 45.475,37.3
  lines w0.2: 18.7,40.8 36.3,40.8 ; 46.24,36.328 73.372,36.328 ; 46.24,45.272 72.372,45.272 ; 48.3,52.8 36.3,40.8 ; 48.7,28.4 36.3,40.8 ; 51.402,47.448 ccw(c36.3,40.8) 51.435,47.372 ; 36.3,40.8 36.3,40.8 ; 36.3,40.8 36.3,40.8
  lines w0.254: 8.201,41.1 ccw(c36.203,40.9) 18.468,62.572
Board Shape:
  drawing of 373 lines, arcs and shapes, not listed

## Dimensions
56.3,40.8 to 8.201,41.1 on Mechanical 1
169.792,59.924 to 171.792,11.224 on Mechanical 1
0.1,6.2 to 140.8,4.7 on Mechanical 1
45.5,41.5 to 66,43.857 on Mechanical 1

## Text inside footprints (layer, text, board x,y; h text height)
J0: Top Overlay "*" at 133.825,23.454 h1.27 r90; Mechanical 13 "*" at 135.603,23.454 h1.27 r90
U3: Top Overlay "*" at 34.648,43.797 h1.27 r315; Mechanical 13 "*" at 35.627,42.817 h1.27 r315
U6#1: Top Overlay "*" at 8.035,37.997 h1.27 r90; Mechanical 13 "*" at 8.035,40.072 h1.27 r90
U6#2: Top Overlay "*" at 50.035,13.845 h1.27 r90; Mechanical 13 "*" at 50.035,15.92 h1.27 r90